# Altium PCB PD_SMARTKEY_EMN-EVAN_V2.0.PcbDoc (part 1 of 2)
Units mil, origin at the board's own origin, x right, y up, seen from the top; angles counter-clockwise.
Board outline 1720.47 x 2326.77 mil, 2 copper layers (Top Layer, Bottom Layer); 109 components, 70 nets, 316 pads, 405 vias.
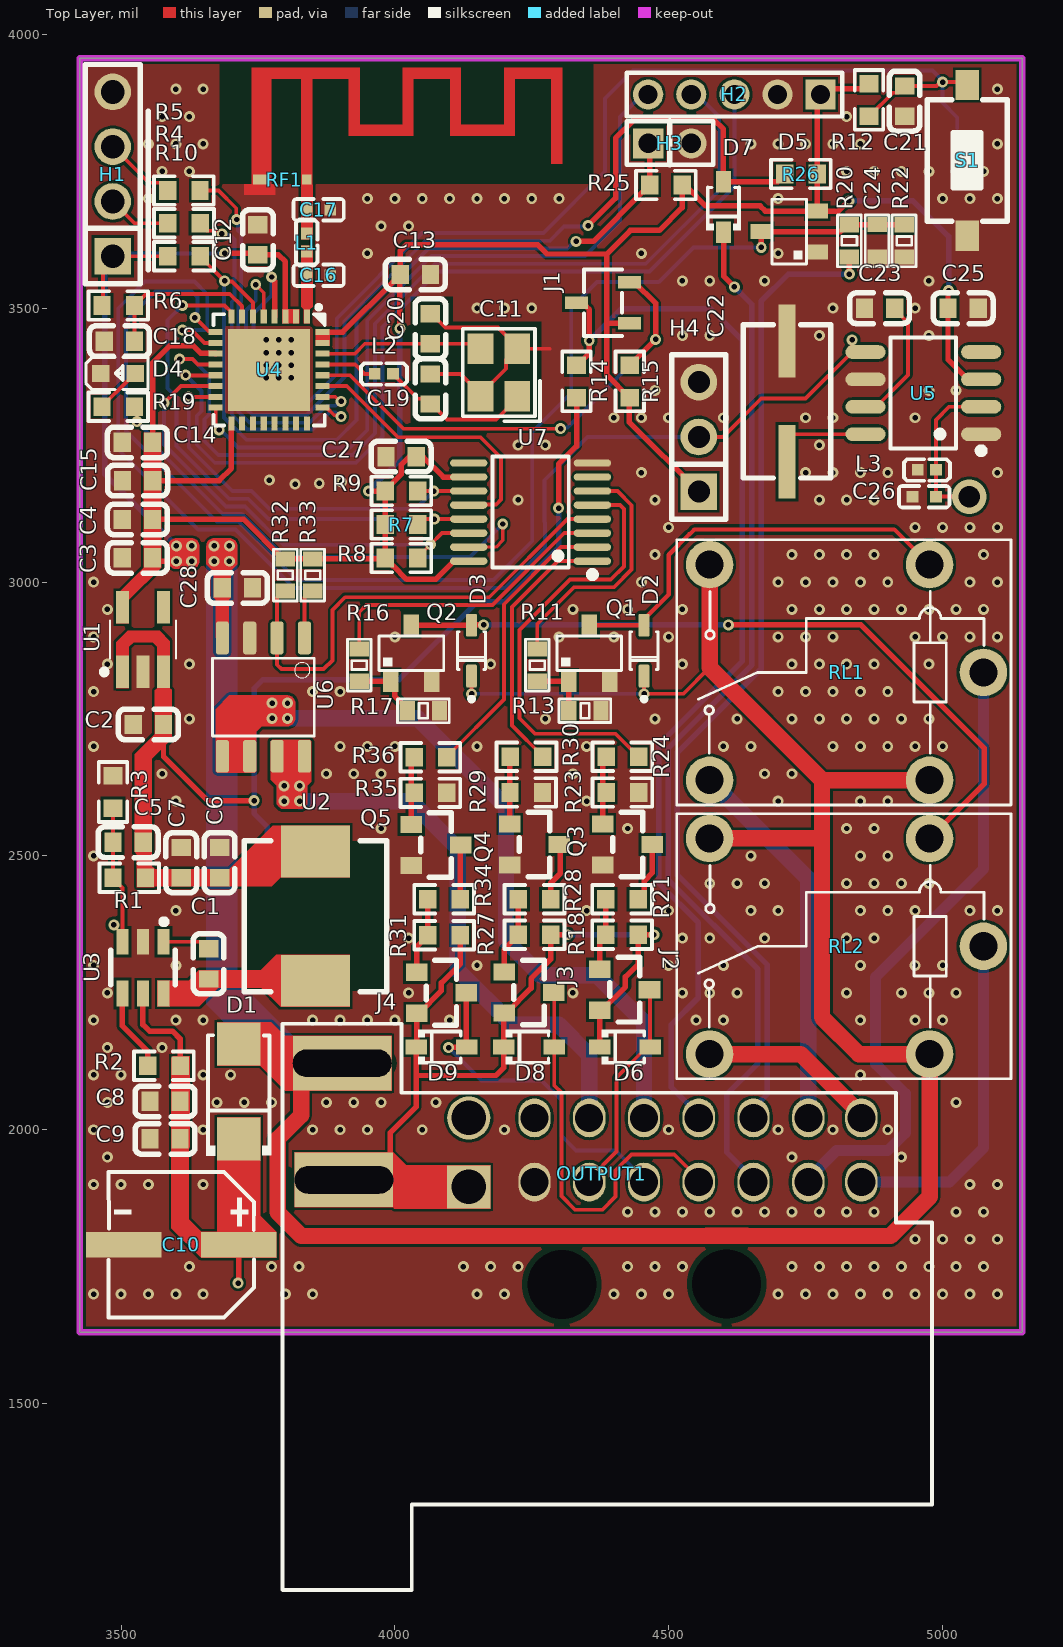
[diagram p0: Top Layer view]
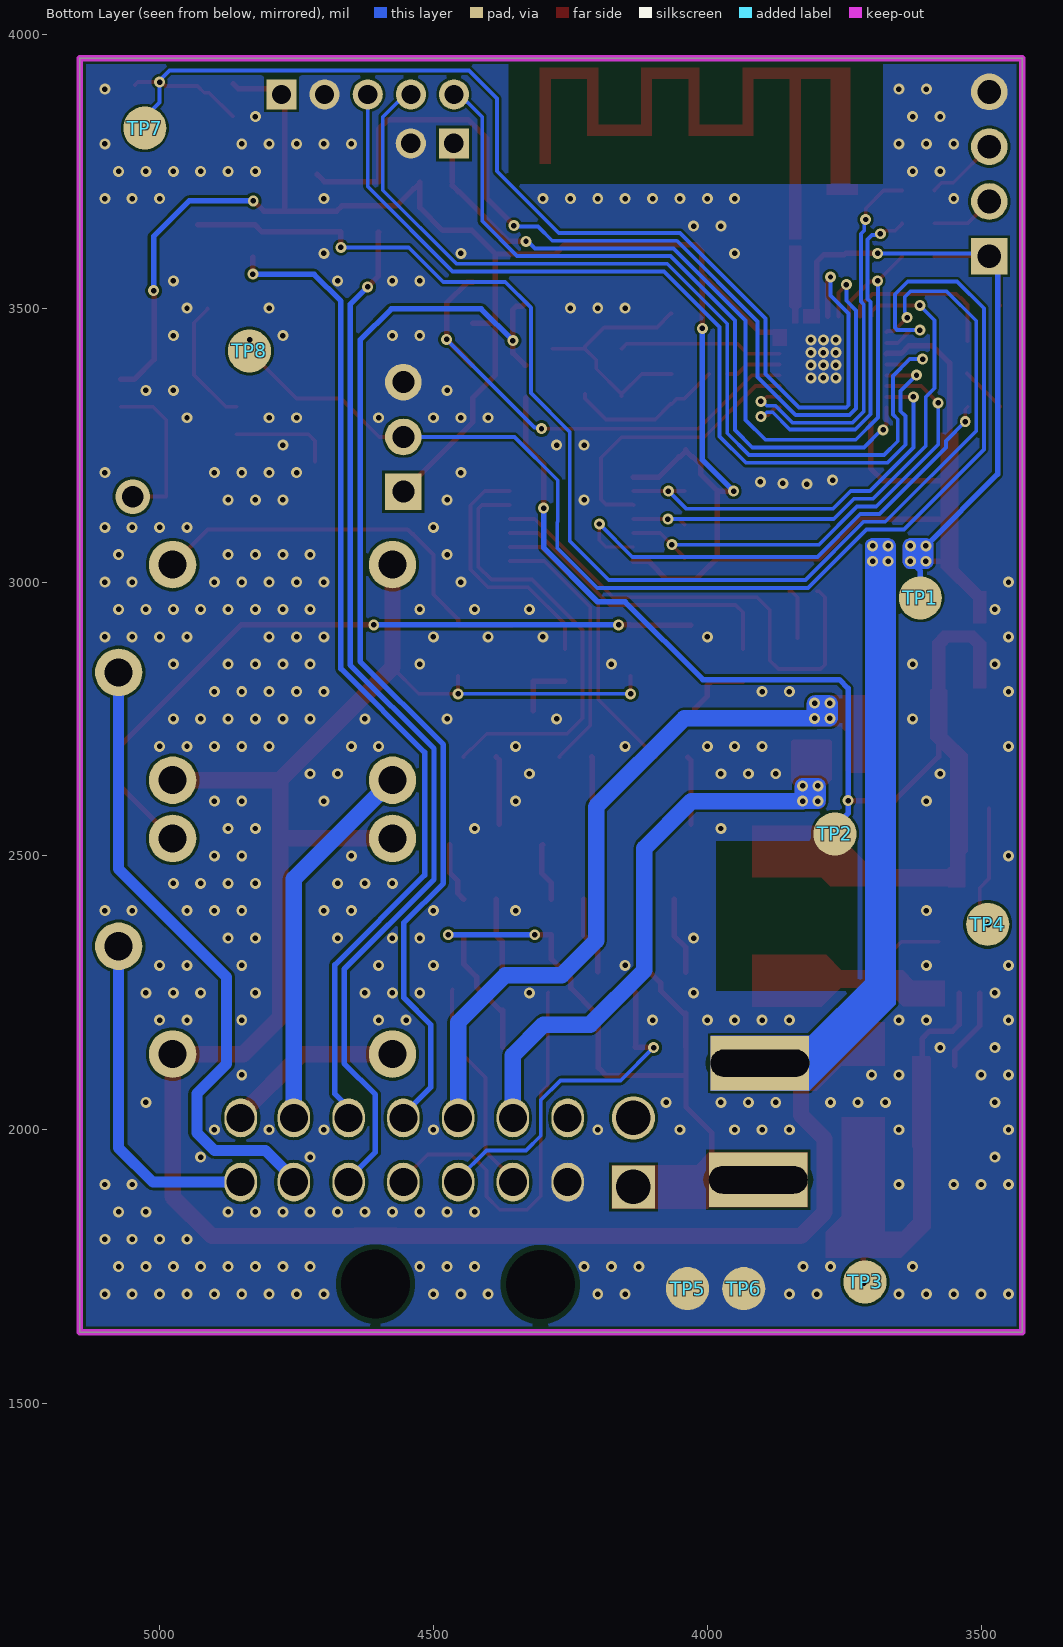
[diagram p1: Bottom Layer view, seen from below]
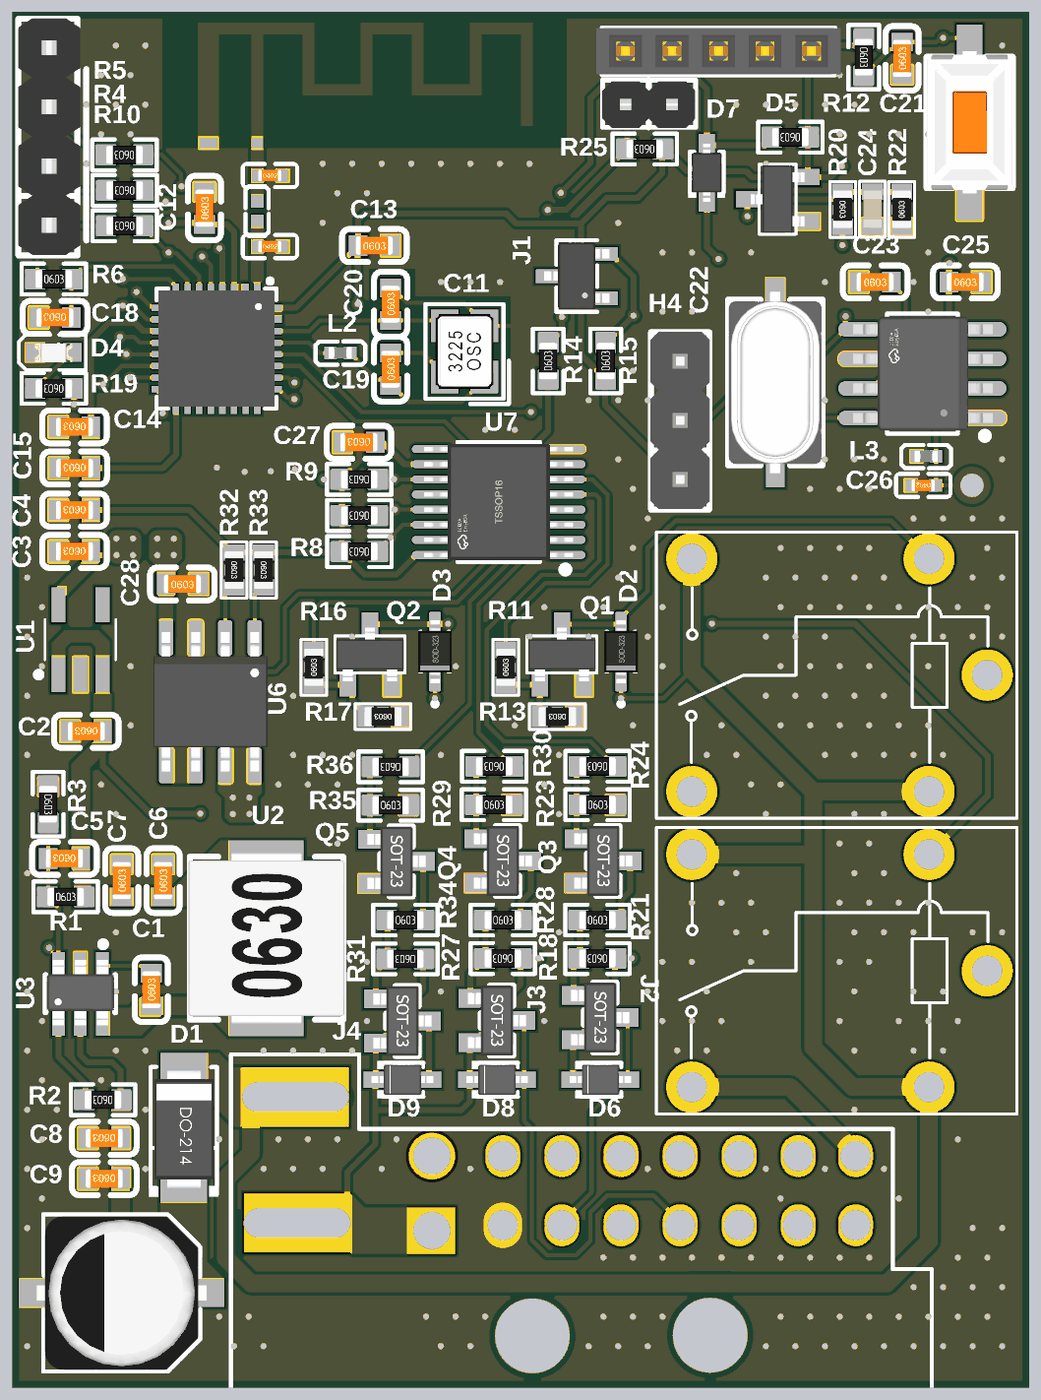
[diagram p3: 3D render of the assembled board from above, using the file's embedded part models]

## Layer stack, top to bottom
Top Solder: solder mask 0.4, Solder Resist, Dk 3.5
Top Layer: signal copper 1.4
Dielectric 1: dielectric 12.6, FR-4, Dk 4.8
Bottom Layer: signal copper 1.4
Bottom Solder: solder mask 0.4, Solder Resist, Dk 3.5

## Board outline
3425,1630 3425,3956.77 5145.47,3956.77 5145.47,1630

## Design rules (kind name [scope] priority, off if disabled: settings)
BoardOutlineClearance [All] p1: gap=7.87 ignorepadtopadclearanceinfootprint=FALSE
Clearance Clearance_1 [IsTrack vs IsTrack] p1: gap=7 ignorepadtopadclearanceinfootprint=FALSE
Clearance [All] p2: gap=5 ignorepadtopadclearanceinfootprint=FALSE except(9.84: Arc-Hole Track-Hole SMDPad-Hole THPad-Hole Via-Hole Fill-Hole Poly-Hole Region-Hole Text-Hole)
ComponentClearance [All] p1: gap=5 collisioncheckmode=3 verticalgap=5 showdistances=TRUE
DiffPairsRouting [All] p1: maxlimit=10 minlimit=5 mostfreqgap=5 toplayer_minwidth=5 toplayer_maxwidth=1000 toplayer_prefwidth=5 bottomlayer_minwidth=5 bottomlayer_maxwidth=1000 bottomlayer_prefwidth=5 maxuncoupledlength=500
Height [All] p1: minheight=0 maxheight=71497.94 prefheight=500
HoleSize [All] p1: absolutevalues=TRUE maxlimit=248.03 minlimit=11.81 maxpercent=80.000 minpercent=20.000
HoleToHoleClearance [All] p1: gap=9.84 allowstackedmicrovias=FALSE
MinimumAnnularRing [All] p1: minimumring=3
MinimumSolderMaskSliver [All] p1: minsoldermaskwidth=0
PlaneClearance [All] p1: clearance=5
PlaneConnect PlaneConnectPowerPads [InPadClass('PowerPads')] p1: planeconnectstyle=Direct reliefexpansion=20 reliefentries=4 reliefconductorwidth=10 reliefairgap=10
PlaneConnect [All] p2: pad.planeconnectstyle=Relief pad.reliefexpansion=11.81 pad.reliefentries=4 pad.reliefconductorwidth=5 pad.reliefairgap=5 via.planeconnectstyle=Direct via.reliefexpansion=11.81 via.reliefentries=4 via.reliefconductorwidth=5 via.reliefairgap=5
PolygonConnect PolygonConnectPowerPads [All vs (InPadClass('PowerPads'))] p1: connectstyle=Direct reliefconductorwidth=10 reliefentries=4 polygonreliefangle="90 Angle" airgapwidth=10
PolygonConnect [All] p2: connectstyle=Direct reliefconductorwidth=5 reliefentries=4 polygonreliefangle="90 Angle" airgapwidth=5
RoutingVias [All] p1: holewidth=10 width=20 viastyle="Through Hole" minholewidth=10 minwidth=20 maxholewidth=10 maxwidth=20
SilkToSilkClearance [All] p1: silktosilkclearance=0
SilkToSolderMaskClearance [IsPad] p1: minsilkscreentomaskgap=5 clearancetoexposedcopper=TRUE
SolderMaskExpansion [All] p1: expansion=2.95 istentingtop=FALSE
Width [All] p1: maxlimit=1000 minlimit=5 preferedwidth=5 minimp=50.000000 maximp=50.000000 favimp=50.000000
20 further rules are at their usual default settings.

## Classes and differential pairs
component class "Voltage Source": C1 C2 C3 C4 C5 C6 C7 C8 C9 C10 D1 R1 R2 R3 TP1 TP2 TP3 TP4 U1 U2 U3
component class Peripheral: C21 C22 C23 C24 C25 C26 C27 C28 D2 D3 D4 D5 D6 D7 D8 D9 H2 H3 H4 J1 J2 J3 J4 L3 Q1 Q2 Q3 Q4 Q5 R11 R12 R13 R14 R15 R16 R17 R18 R19 R20 R21 R22 R23 R24 R25 R26 R27 R28 R29 R30 R31 R32 R33 R34 R35 R36 RL1 RL2 S1 TP7 TP8 U5 U6 U7
component class "Micro Controller": C11 C12 C13 C14 C15 C16 C17 C18 C19 C20 H1 L1 L2 R4 R5 R6 R7 R8 R9 R10 RF1 TP5 TP6 U4
component class Connector: OUTPUT1
differential pair D: +D_P -D_N

## Components (designator, comment, footprint, x,y, rotation, side; value= is the part's Value field where it differs from the comment)
C1 "100nF" C0603 3660,2303 r90 top
C2 "10uF" C0603 3550,2740 r180 top
C3 "10uF" C0603 3530,3044.25 r180 top
C4 "100nF" C0603 3530,3114.25 r180 top
C5 "100pF" C0603 3512.9,2525 r180 top
C6 "100nF" C0603 3680,2487.56 r90 top
C7 "10uF" C0603 3610,2487.56 r90 top
C8 "100nF" C0603 3580.32,2051.75 r180 top
C9 "10uF" C0603 3580.32,1983.38 r180 top
C10 "VT1C101M0605" C_100uF_16V_Aluminum 3609.88,1790 r180 top
C11 "XL2EL89CPI-111YLC-40M" XL2EL89CPI-111YLC-40M 4190,3382.56 r90 top
C12 "1uF" C0603 3750,3625 r90 top
C13 "10uF" C0603 4037.44,3561.59 r0 top
C14 "10uF" C0603 3530,3255 r180 top
C15 "100nF" C0603 3530.29,3185.33 r180 top
C16 "NC" C0402 3860.83,3560 r0 top
C17 "NC" C0402 3860.83,3680 r0 top
C18 "1uF" C0603 3497.1,3440 r180 top
C19 "12pF" C0603 4065,3352.56 r90 top
C20 "12pF" C0603 4065,3462.56 r90 top
C21 "100nF" C0603 4930.75,3878.22 r90 top
C22 "6.7458M 12PF 20PPM" "6.7458M 12PF 20PPM" 4715.98,3330 r90 top
C23 "3.3uF" C0603 4885,3500 r0 top
C24 "100nF" C-0603 4880.57,3623.13 r90 top value=103
C25 "10uF" C0603 5037.56,3500 r0 top
C26 "8.2pF" C0402 4966.54,3156 r180 top
C27 "10uF" C0603 4011.44,3229 r180 top
C28 "100nF" C0603 3712.56,2989.25 r0 top
D1 "SS34" SS34 3715,2070 r90 top
D2 "1N5819" SOD-323 4455,2874.72 r90 top value=1N5007
D3 "1N5819" SOD-323 4140,2874.72 r90 top value=1N5007
D4 "RED" LED0603 3494.52,3380.86 r0 top
D5 "BAT54S" SOT23-3 4720,3640 r90 top
D6 "1N4007WS" 1N4007WS 4420,2150.75 r0 top
D7 "1N5819WS" 1N5819WS 4600,3685 r90 top
D8 "1N4007WS" 1N4007WS 4245,2150.75 r0 top
D9 "1N4007WS" 1N4007WS 4085,2150.75 r0 top
H1 "PZ2.54-S04P-A60" J_4P_XH2.54 3485,3745 r90 top
H2 "HC-PM200-4.3H-1x5PZ" JC_5P_XH2.0 4620,3890 r180 top
H3 "PZ2.0-1*2" JC_2P_XH2.0 4502,3801 r0 top
H4 "PZ254V-11-03P" PZ254V-11-03P 4555,3265 r90 top
J1 "BSS138" BSS138 4380,3510 r0 top
J2 "AO3401A" AO3401 4419.73,2255.75 r180 top
J3 "AO3401A" AO3401 4245,2250.75 r180 top
J4 "AO3401A" AO3401 4085,2250 r180 top
L1 "LQG15HS1N0B02D" L0402_1nH 3839.37,3620 r270 top
L2 "LQW15AN24NG00D" LQW15AN24NG00D 3980,3380.12 r0 top
L3 "LQW15AN24NG00D" LQW15AN24NG00D 4971.47,3205 r0 top
OUTPUT1 "JP9x2" 9x2_JP200 4393.9,1653.48 r0 top
Q1 "AO3402" SOT23-3 4355,2870 r0 top
Q2 "AO3402" SOT23-3 4030,2870 r0 top
Q3 "AO3402" AO3402 4425,2520.75 r180 top
Q4 "AO3402" AO3402 4255,2520.75 r180 top
Q5 "AO3402" AO3402 4075,2520 r180 top
R1 "51kΩ" R0603 3515,2460 r0 top
R2 "5k1Ω" R0603 3578.22,2116.75 r180 top
R3 "6.8kΩ" R0603 3485.34,2616.66 r270 top
R4 "22" R0603 3615,3655 r180 top
R5 "22" R0603 3614.66,3715 r180 top
R6 "10kΩ" R0603 3495,3505 r0 top
R7 "10kΩ" R0603 4012,3105 r180 top
R8 "10kΩ" R0603 4012,3044 r180 top
R9 "10kΩ" R0603 4011.85,3166.18 r180 top
R10 "10kΩ" R0603 3615,3595 r180 top
R11 "1K" RES-SMD-0603 4260,2848.35 r90 top
R12 "10kΩ" R0603 4865.75,3880.32 r270 top
R13 "10K" RES-SMD-0603 4347.13,2765 r180 top
R14 "10kΩ" R0603 4331.75,3366.42 r90 top
R15 "10kΩ" R0603 4429.02,3366.42 r90 top
R16 "1K" RES-SMD-0603 3935,2848.35 r90 top
R17 "10K" RES-SMD-0603 4052.13,2765 r180 top
R18 "10kΩ" R0603 4415,2355.75 r180 top
R19 "1kΩ" R0603 3495,3320 r180 top
R20 "47K" RES-SMD-0603 4830,3622.87 r270 top
R21 "5k1Ω" R0603 4415,2420.75 r0 top
R22 "10K" RES-SMD-0603 4930,3622.87 r90 top
R23 "10kΩ" R0603 4415.34,2615.75 r0 top
R24 "1kΩ" R0603 4415.34,2680.75 r180 top
R25 "10kΩ" R0603 4495,3725 r180 top
R26 "10kΩ" R0603 4741.52,3745 r180 top
R27 "10kΩ" R0603 4255,2355.75 r180 top
R28 "5k1Ω" R0603 4255,2420.75 r0 top
R29 "10kΩ" R0603 4240,2615.75 r0 top
R30 "1kΩ" R0603 4240.34,2680.75 r180 top
R31 "10kΩ" R0603 4090,2355 r180 top
R32 "10K" RES-SMD-0603 3800,3012.87 r270 top
R33 "10K" RES-SMD-0603 3850,3012.87 r270 top
R34 "5k1Ω" R0603 4090,2420.75 r0 top
R35 "10kΩ" R0603 4065,2615 r0 top
R36 "1kΩ" R0603 4065,2680 r180 top
RF1 "" 2.4GHZ-50OHMS_v1.1 3756.57,3726 r0 top
RL1 "SRA-12VDC-CL" YL318-DC12V-C 4820,2835 r0 top value="Relay SPDT, 10A, 12V"
RL2 "SRA-12VDC-CL" YL318-DC12V-C 4820,2335 r0 top value="Relay SPDT, 10A, 12V"
S1 "SW-SMD" SW-SMD 5045,3770 r270 top
TP1 "TP" TP 3611,2971 r0 top
TP2 "TP" TP 3767,2540 r0 top
TP3 "TP" TP 3712,1722 r0 top
TP4 "TP" TP 3488,2375 r0 top
TP5 "TP" TP 4036.11,1709.89 r0 top
TP6 "TP" TP 3933.37,1709.89 r0 top
TP7 "TP" TP 5027,3829 r0 top
TP8 "TP" TP 4836,3422 r0 top
U1 "AP2112K-3.3TRG1" SOT23-5 3540.16,2895 r90 top
U2 "XR0630-4R7M" SMD,7x6.6mm 3855,2390 r90 top
U3 "SM8103ADC" TSOT-23-6 3540,2305 r180 top
U4 "ESP32-C3" ESP32-C3 3770.47,3387.46 r270 top
U5 "SYN480R" SYN480R 4965,3345 r90 top
U6 "RZ7889" SO8 3760,2790 r180 top
U7 "74HC595PW,118" 74HC595PW,118 4247.82,3127.79 r90 top

## Footprints (in the part's own frame and the unit in brackets; to place one, negate y for a bottom-side part, rotate by r counter-clockwise, add the part's x,y. Pads: shape width x height; smd on the part's side, far side on the other; paste and mask are expansions set on the pad)
1N4007WS [mm] "DIODE STANDARD 1kV 1A SOD-323"
  rect 1x0.7 smd paste+0 mask+0.051: 1(-1.173,0) 2(1.173,0)
  silkscreen extent -1.08,-0.8 0.9,0.8, body extent -1.33,-0.65 1.33,0.65, height 1.21
1N5819WS [mm] "DIODE SCHOTTKY 40V SOD-323"
  rect 1x0.7 smd paste+0 mask+0.051: 1(-1.173,0) 2(1.173,0)
  silkscreen extent -1.08,-0.8 0.9,0.8, body extent -1.25,-0.65 1.25,0.65, height 1
2.4GHZ-50OHMS_v1.1 [mm]
  rect 0.45x0.45 smd: 1(2.103,0.229)
  rect 0.8x0.45 smd: 2(0,0.229)
  Top Layer region: 13.947,0.963 13.447,0.963 13.447,4.903 11.747,4.903 11.747,2.263 8.747,2.263 8.747,4.903 7.047,4.903 7.047,2.263 4.047,2.263 4.047,4.903 2.347,4.903 2.347,0.003 1.847,0.003 1.847,4.903 0.447,4.903 0.447,0.003 -0.453,0.003 -0.453,5.403 4.547,5.403 4.547,2.763 6.547,2.763 6.547,5.403 9.247,5.403 9.247,2.763 11.247,2.763 11.247,5.403 13.947,5.403
"6.7458M 12PF 20PPM" [mm] "CRYSTAL 6.7458MHz 12pF SMD"
  rect 3.4x0.8 smd paste+0 mask+0.05: 1(-2.8,0) 2(2.8,0)
  silkscreen extent -3.56,-2.03 3.56,2.03, body extent -3.9,-2 3.9,2, height 2.35
9x2_JP200 [mm]
  rect 2x2 hole 1.6 paste-2539.97: 1(-6.579,6.147)
  oval 1.5x1.8 hole 1.3: 2(-3.531,6.375) 3(-0.991,6.375) 4(1.549,6.375) 5(4.089,6.375) 6(6.629,6.375) 7(9.169,6.375) 8(11.633,6.375) 9(11.633,9.347) 10(9.169,9.347) 11(6.629,9.347) 14(-0.991,9.347) 15(-3.531,9.347)
  oval 1.5x1.8 hole 1.3 mask+0.127: 12(4.089,9.347) 13(1.549,9.347)
  round 2 hole 1.6 mask+0.127: 16(-6.579,9.347)
  rect 4.572x2.54 hole 1.27 slot 4.572 at 0 deg: 17(-12.446,11.887) 18(-12.37,6.477)
  round 1.524 hole 3.2: ""(-2.261,1.626) ""(5.385,1.651)
  silkscreen extent -15.21,-12.55 14.91,13.72, body extent -15.21,-12.55 14.91,13.72, height 17
74HC595PW,118 [mm] "8-bit serial-in, serial or parallel-out shift register with output latches; 3-state"
  oval 0.343x1.731 smd paste+0 mask+0.051: 1(-2.275,-2.866) 2(-1.625,-2.866) 3(-0.975,-2.866) 4(-0.325,-2.866) 5(0.325,-2.866) 6(0.975,-2.866) 7(1.625,-2.866) 8(2.275,-2.866) 9(2.275,2.866) 10(1.625,2.866) 11(0.975,2.866) 12(0.325,2.866) 13(-0.325,2.866) 14(-0.975,2.866) 15(-1.625,2.866) 16(-2.275,2.866)
  silkscreen extent -3.05,-3.02 2.58,1.77, body extent -2.5,-3.2 2.5,3.2, height 1.03
AO3401 [mm]
  rect 1x0.8 smd paste+0 mask+0.051: 1(1.15,-0.95) 2(1.15,0.95) 3(-1.15,0)
  silkscreen extent -0.7,-1.5 0.7,1.5, body extent -1.25,-1.5 1.25,1.5, height 1.1
AO3402 [mm] "MOSFET N-CH 30V SOT-23"
  rect 1x0.8 smd paste+0 mask+0.051: 1(1.15,-0.95) 2(1.15,0.95) 3(-1.15,0)
  silkscreen extent -0.7,-1.5 0.7,1.5, body extent -1.25,-1.5 1.25,1.5, height 1.1
BSS138 [mm] "MOSFET N-CH 50V 0.22A SOT-23"
  rect 1.07x0.6 smd paste+0 mask+0.051: 1(1.235,-0.95) 2(1.235,0.95) 3(-1.235,0)
  silkscreen extent -0.88,-1.54 0.88,1.54, body extent -1.4,-1.45 1.4,1.45, height 1.1
C0402 [mm]
  rect 0.54x0.54 smd paste-100 mask+0.051: 1(-0.545,0) 2(0.545,0)
  silkscreen extent -1.17,-0.5 1.17,0.5, body extent -0.5,-0.25 0.5,0.25, height 0.36
C0603 [mm]
  rect 0.8x0.9 smd: 1(-0.7,0) 2(0.7,0)
  silkscreen extent -1.39,-0.71 1.39,0.71, body extent -0.8,-0.4 0.8,0.4, height 0.4
C-0603 [mm]
  rect 0.7x0.9 smd: 1(-0.75,0) 2(0.75,0)
  silkscreen extent -1.2,-0.55 1.2,0.55, body extent -0.8,-0.4 0.8,0.4, height 0.8
C_100uF_16V_Aluminum [mm] "100uF 16V ±20% 63mA@120Hz SMD,D6.3xL5.4mm Aluminum Electrolytic Capacitors RoHS"
  rect 3.5x1.2 smd paste+0 mask+0.051: 1(-2.67,0) 2(2.67,0)
  silkscreen extent -3.38,-3.38 3.38,3.38, body extent -3.65,-3.3 3.65,3.3, height 5.8
ESP32-C3 [mm] "Others 160MHz QFN-32-EP(5x5) RF Transceiver Modules and Modems RoHS"
  rect 0.65x0.28 smd paste-100 mask+0.051: 1(-2.478,1.75) 2(-2.478,1.25) 3(-2.478,0.75) 4(-2.478,0.25) 5(-2.478,-0.25) 6(-2.478,-0.75) 7(-2.478,-1.25) 8(-2.478,-1.75) 17(2.478,-1.75) 18(2.478,-1.25) 19(2.478,-0.75) 20(2.478,-0.25) 21(2.478,0.25) 22(2.478,0.75) 23(2.478,1.25) 24(2.478,1.75)
  rect 0.28x0.65 smd paste-100 mask+0.051: 9(-1.75,-2.478) 10(-1.25,-2.478) 11(-0.75,-2.478) 12(-0.25,-2.478) 13(0.25,-2.478) 14(0.75,-2.478) 15(1.25,-2.478) 16(1.75,-2.478) 25(1.75,2.478) 26(1.25,2.478) 27(0.75,2.478) 28(0.25,2.478) 29(-0.25,2.478) 30(-0.75,2.478) 31(-1.25,2.478) 32(-1.75,2.478)
  rect 3.8x3.8 smd paste-100 mask+0.051: 33(0,0)
  silkscreen extent -3,-2.58 2.58,2.58, body extent -2.5,-2.5 2.5,2.5, height 0.9
J_4P_XH2.54 [mm] "1kV 1 2.54mm Pin Header 3A 2.5mm Through Hole 6mm -40?~+105? 3mm Gold 4P Black 1x4P Through Hole,P=2.54mm Headers, Male Pins RoHS"
  rect 1.7x1.7 hole 1.1 paste-2539.97 mask+0.051: 1(-3.81,0)
  round 1.7 hole 1.1 paste-2539.97 mask+0.051: 2(-1.27,0) 3(1.27,0) 4(3.81,0)
  silkscreen extent -5.08,-1.27 5.08,1.27, body extent -5.05,-1.38 5.12,1.28, height 8.54
JC_2P_XH2.0 [mm] "CONN HEADER 2POS 2mm SINGLE ROW TH"
  rect 1.4x1.4 hole 0.9 paste-2539.97 mask+0.051: 1(-1,0)
  round 1.4 hole 0.9 paste-2539.97 mask+0.051: 2(1,0)
  silkscreen extent -1.99,-1 2.02,1.03, body extent -2,-1.03 2.01,0.97, height 5.9
JC_5P_XH2.0 [mm] "CONN SOCKET 5POS 2mm SINGLE ROW TH"
  rect 1.4x1.4 hole 0.889 paste-2539.97 mask+0.051: 1(-4,-0.013)
  round 1.4 hole 0.889 paste-2539.97 mask+0.051: 2(-2,-0.013) 3(0,-0.013) 4(2,-0.013) 5(4,-0.013)
  silkscreen extent -5,-1.01 5,1.01, body extent -5.25,-1.01 5.26,0.99, height 6.35
L0402_1nH [mm]
  rect 0.54x0.54 smd paste+0 mask+0.051: 1(-0.42,0) 2(0.42,0)
  silkscreen extent -1.07,-0.51 1.07,0.49
LED0603 [mm]
  rect 0.8x0.8 smd paste+0 mask+0.051: 1(-0.799,-0.004) 2(0.799,0.004)
  silkscreen extent -1.49,-0.75 1.39,0.76, body extent -0.8,-0.42 0.8,0.38, height 0.7
LQW15AN24NG00D [mm] "FIXED IND 24nH 280mA 520mO 0402"
  rect 0.54x0.54 smd paste+0 mask+0.051: 1(-0.42,0) 2(0.42,0)
  silkscreen extent -1.07,-0.51 1.07,0.49, body extent -0.5,-0.25 0.5,0.25, height 0.5
PZ254V-11-03P [mm] "CONN HEADER 3POS 2.54mm SINGLE ROW TH"
  rect 1.7x1.7 hole 1.02 paste-2539.97 mask+0.051: 1(-2.54,0)
  round 1.7 hole 1.02 paste-2539.97 mask+0.051: 2(0,0) 3(2.54,0)
  silkscreen extent -3.81,-1.25 3.81,1.25, body extent -3.78,-1.27 3.85,1.27, height 8
R0603 [mil]
  rect 31.75x34.02 smd paste-3937.01 mask+2: 1(-29.66,0) 2(29.66,0)
  silkscreen extent -55,-26 55,26, body extent -31,-16 31,16, height 18
RES-SMD-0603 [mm]
  rect 0.7x0.9 smd: 1(-0.75,0) 2(0.75,0)
  silkscreen extent -1.2,-0.55 1.2,0.55, body extent -0.8,-0.4 0.8,0.4, height 0.43
SMD,7x6.6mm [mm] "FIXED IND 4.7uH 6A 33mO SMD,0630"
  rect 2.4x3.2 smd paste+0 mask+0.051: 1(-3,0) 2(3,0)
  silkscreen extent -3.5,-3.3 3.5,3.3, body extent -3.65,-3.35 3.65,3.35, height 3.01
SO8 [mil]
  rrect40% 24x60 smd: 1(-75,-108) 2(-25,-108) 3(25,-108) 4(75,-108) 5(75,108) 6(25,108) 7(-25,108) 8(-75,108)
  silkscreen extent -93,-71 93,71, body extent -96,-118 96,118, height 69
SOD-323 [mm]
  rrect25% 1.06x0.5 smd: 1(1.18,0) 2(-1.18,0)
  silkscreen extent -2.35,-0.65 0.87,0.65, body extent -1.35,-0.72 1.35,0.72, height 1.17
SOT23-3 [mm]
  rect 0.7x1 smd: 1(-0.95,-1.3) 2(0.95,-1.3) 3(0,1.3)
  silkscreen extent -1.5,-0.8 1.5,0.8, body extent -1.45,-1.15 1.45,1.15, height 1.1
SOT23-5 [mm]
  rect 1.5x0.6 smd: 1(-1.5,0.95) 2(-1.5,0) 3(-1.5,-0.95) 4(1.5,-0.95) 5(1.5,0.95)
  silkscreen extent -1.62,-1.52 0.87,1.92, body extent -1.75,-1.52 1.75,1.53, height 1.45
SS34 [mm]
  rect 2x2 smd paste+0 mask+0.051: 1(-2.2,0) 2(2.2,0)
  silkscreen extent -2.98,-1.5 2.6,1.5, body extent -2.65,-1.29 2.49,1.27, height 2.63
SW-SMD [mm]
  rect 1.4x1.1 smd: 1(-3.5,0) 2(3.5,0)
  silkscreen extent -2.82,-1.85 2.82,1.85, body extent -3.05,-1.85 3.05,1.85, height 2.5
SYN480R [mm] "433/315 MHz wireless receiver chips"
  oval 0.63x1.865 smd paste+0 mask+0.051: 1(-1.905,-2.682) 2(-0.635,-2.682) 3(0.635,-2.682) 4(1.905,-2.682) 5(1.905,2.682) 6(0.635,2.682) 7(-0.635,2.682) 8(-1.905,2.682)
  silkscreen extent -2.82,-2.83 2.58,1.52, body extent -2.45,-3.03 2.45,2.97, height 1.49
TP [mm]
  round 2 smd far side paste+0 mask+0.051: 1(0,0)
TSOT-23-6 [mm] "High Efficiency, 3.0A, 18V Input Synchronous Step Down Regulator"
  rect 0.55x1.2 smd paste+0 mask+0.051: 1(-0.95,-0.974) 2(0,-0.974) 3(0.95,-0.974) 4(0.95,1.426) 5(0,1.426) 6(-0.95,1.426)
  silkscreen extent -1.5,-2.03 1.5,1.03, body extent -1.45,-1.22 1.45,1.58, height 1
XL2EL89CPI-111YLC-40M [mm] "CRYSTAL 40MHz 15pF SMD"
  rect 1.4x1.2 smd paste+0 mask+0.051: 1(-1.1,-0.85) 2(1.1,-0.85) 3(1.1,0.85) 4(-1.1,0.85)
  silkscreen extent -2.26,-1.91 2.03,1.68, body extent -1.6,-1.25 1.6,1.25, height 0.68
YL318-DC12V-C [mm]
  round 2.2 hole 1.3: 1(6.47,0) 2(-6.23,-5) 3(-6.23,5) 4(3.97,5) 5(3.97,-5)
  silkscreen extent -7.75,-6.15 7.75,6.15, body extent -7.75,-6.15 7.75,6.15, height 13.5

## Part data
C1 C6 C8 C21 C28: library part C0603_100nF_±1%, LCSC Part #=C513681, Manufacturer=YAGEO, Mfr. Part #=CC0402FRNPO9BN100, Package=0603, Tolerance=±1%, Voltage Rating=50V, Capacitance=100nF, Link=https://www.lcsc.com/product-detail/C513681.html?s_z=n_capital%2520yageo%252010pF%25200402
C2 C3 C13 C14: library part C0603_10uF_±1%, "50V 10pF NP0 ±1% 0402 Multilayer Ceramic Capacitors MLCC - SMD/SMT ROHS", LCSC Part #=C513681, Manufacturer=YAGEO, Mfr. Part #=CC0402FRNPO9BN100, Package=0603, Tolerance=±1%, Voltage Rating=50V, Capacitance=10uF, Link=https://www.lcsc.com/product-detail/C513681.html?s_z=n_capital%2520yageo%252010pF%25200402
C4 C15: library part C0603_100nF_±1%, "50V 10pF NP0 ±1% 0402 Multilayer Ceramic Capacitors MLCC - SMD/SMT ROHS", LCSC Part #=C513681, Manufacturer=YAGEO, Mfr. Part #=CC0402FRNPO9BN100, Package=0603, Tolerance=±1%, Voltage Rating=50V, Capacitance=100nF, Link=https://www.lcsc.com/product-detail/C513681.html?s_z=n_capital%2520yageo%252010pF%25200402
C5: library part C0603_100pF_±1%, LCSC Part #=C513681, Manufacturer=YAGEO, Mfr. Part #=CC0402FRNPO9BN100, Package=0603, Tolerance=±1%, Voltage Rating=50V, Capacitance=100pF, Link=https://www.lcsc.com/product-detail/C513681.html?s_z=n_capital%2520yageo%252010pF%25200402
C7 C9 C25 C27: library part C0603_10uF_±1%, LCSC Part #=C513681, Manufacturer=YAGEO, Mfr. Part #=CC0402FRNPO9BN100, Package=0603, Tolerance=±1%, Voltage Rating=50V, Capacitance=10uF, Link=https://www.lcsc.com/product-detail/C513681.html?s_z=n_capital%2520yageo%252010pF%25200402
C10: library part C_100uF_16V_aluminum, "100uF 16V ±20% 63mA@120Hz SMD,D6.3xL5.4mm Aluminum Electrolytic Capacitors RoHS", LCSC Part #=C90273, Manufacturer=ROQANG, Package=SMD,D6.3xL5.4mm, Key Attributes="CAP ALUM 100uF ±20% 16V SMD", Link=https://www.lcsc.com/product-detail/C90273.html?s_z=n_capital%2520100uf%2520aluminum, Mfr. Part #=VT1C101M0605
C11: "Crystal Oscillator 15pF SMD3225-4P Crystals RoHS", LCSC Part #=C5444549, Manufacturer="YXC Crystal Oscillators", Package=SMD3225-4P, Key Attributes="Crystal Oscillator 15pF SMD3225-4P Crystals RoHS", Link=https://www.lcsc.com/product-detail/C5444549.html?s_z=n_oscillator, Mfr. Part #=XL2EL89CPI-111YLC-40M
C12 C18: library part C0603_1uF_±1%, "50V 10pF NP0 ±1% 0402 Multilayer Ceramic Capacitors MLCC - SMD/SMT ROHS", LCSC Part #=C513681, Manufacturer=YAGEO, Mfr. Part #=CC0402FRNPO9BN100, Package=0603, Tolerance=±1%, Voltage Rating=50V, Capacitance=1uF, Link=https://www.lcsc.com/product-detail/C513681.html?s_z=n_capital%2520yageo%252010pF%25200402
C16 C17: library part C0402_NC_±1%, Capacitance=1uF, LCSC Part #=C513681, Manufacturer=YAGEO, Mfr. Part #=CC0402FRNPO9BN100, Package=0402, Tolerance=±1%, Voltage Rating=50V, Link=https://www.lcsc.com/product-detail/C513681.html?s_z=n_capital%2520yageo%252010pF%25200402
C19 C20: library part C0603_12pF_±1%, "50V 10pF NP0 ±1% 0402 Multilayer Ceramic Capacitors MLCC - SMD/SMT ROHS", LCSC Part #=C513681, Manufacturer=YAGEO, Mfr. Part #=CC0402FRNPO9BN100, Package=0603, Tolerance=±1%, Voltage Rating=50V, Capacitance=12pF, Link=https://www.lcsc.com/product-detail/C513681.html?s_z=n_capital%2520yageo%252010pF%25200402
C22: "CRYSTAL 6.7458MHz 12pF SMD", LCSC Part #=C4944008, Load Capacitance=20pF, Manufacturer=SOSET, Package=HC-49S-SMD-2P-Mini, Link=https://www.lcsc.com/product-detail/C4944008.html?utm_source=chatgpt.com, Mfr. Part #="6.7458M 12PF 20PPM"
C23: library part C0603_3.3uF_±10%, LCSC Part #=C710616, Manufacturer=muRata, Mfr. Part #=GCJ188C70J335KE02D, Package=0603, Temperature Coefficient=X7S, Tolerance=±10%, Voltage Rating=50V, Capacitance=3.3uF, Link=https://www.lcsc.com/product-detail/C710616.html?s_z=n_Capita%25200603%25203.3uF%2520yageo
C24: library part CM, "Cap SMD"
C26: library part C0402_10pF_±1%, "50V 10pF NP0 ±1% 0402 Multilayer Ceramic Capacitors MLCC - SMD/SMT ROHS", Capacitance=10pF, LCSC Part #=C513681, Manufacturer=YAGEO, Mfr. Part #=CC0402FRNPO9BN100, Package=0402, Tolerance=±1%, Voltage Rating=50V, Link=https://www.lcsc.com/product-detail/C513681.html?s_z=n_capital%2520yageo%252010pF%25200402
D1: "40V Independent 3A 550mV@3A SMA(DO-214AC) Schottky Diodes ROHS", Current - Rectified=3A, LCSC Part #=C8678, Manufacturer="MDD(Microdiode Semiconductor)", Package=SMA(DO-214AC), Voltage - DC Reverse(Vr)=40V, Link=https://www.lcsc.com/product-detail/C8678.html?s_z=n_SS34, Mfr. Part #=SS34
D2 D3: library part "Diode SMD", "Default Diode", Code - JEDEC=DO-214-AB, Published=8-Jun-2000, Publisher="Altium Limited", Revision="July-2002: Re-released for DXP Platform."
D4: library part D0603_RED, "25mcd~40mcd Water Clear -40℃~+85℃ 624nm Red 120° 60mW 0402 LED Indication - Discrete ROHS", LCSC Part #=C965793, Manufacturer=XINGLIGHT, Mfr. Part #=XL-1005UGC, Package=0603, Power(Watts)=60mW, Voltage - Forward(Vf)=3V, Illumination Color=RED, Link=https://www.lcsc.com/product-detail/C136765.html?s_z=n_LED%25200402%2520RED
D5: library part "Schottky Dual Diode SMD", "Diode 30V 0.2A Surface Mount SOT-23", Datasheet=https://diotec.com/request/datasheet/bat54.pdf, ki_description="Dual Schottky Diode in Series", ki_keywords="Dual Schottky Diode Series"
D6 D8 D9: "DIODE STANDARD 1kV 1A SOD-323", LCSC Part #=C193404, Manufacturer="MDD(Microdiode Semiconductor)", Package=SOD-323, Link=https://www.lcsc.com/product-detail/C193404.html?utm_source=chatgpt.com, Mfr. Part #=1N4007WS
D7: "DIODE SCHOTTKY 40V SOD-323", LCSC Part #=SOD-323, Manufacturer="Guangdong Hottech", Link=https://www.lcsc.com/product-detail/C191023.html?s_z=n_q_t_1n5819&spm=wm.fly.bg.0.xh___wm.ssy.tc.0.tz&lcsc_vid=FFlaVlZURFlbX1EAE1lbUlZfQwdeBlBRQ1VZBFdQQwUxVlNeQ1RdUFFfRVVZVDsOAxUeFF5JWBYZEEoKFBINSQcJGk4eFQsCAgIaSgADAwAHC0slRFJfVVJQRE8GEwkK, Mfr. Part #=1N5819WS, Package=SOD-323
H1: library part J_4P_XH2.54, "1kV 1 2.54mm Pin Header 3A 2.5mm Through Hole 6mm -40℃~+105℃ 3mm Gold 4P Black 1x4P Through Hole,P=2.54mm Headers, Male Pins RoHS", LCSC Part #=C42431795, Manufacturer=JXTCONN, Link=https://www.lcsc.com/product-detail/C42431795.html?s_z=n_q_t_header%25204%2520p&spm=wm.fly.bg.0.xh___wm.ssy.tc.0.tz&lcsc_vid=FlRcBlcDRFNZAlJQT1RZBVJSEVFcX11eRVQPBFEHFgAxVlNeQVVcV1RRRlFeUzsOAxUeFF5JWBYZEEoKFBINSQcJGk4dAgUUFAk%3D, MPN=PZ2.54-S04P-A60, Packaging="Through Hole,P=2.54mm"
H2: library part JC_5P_XH2.0X_, "CONN SOCKET 5POS 2mm SINGLE ROW TH", LCSC Part #=C22436139, Manufacturer="Hong Cheng", Link=https://www.lcsc.com/product-detail/C22436139.html?utm_source=chatgpt.com, MPN=HC-PM200-4.3H-1x5PZ, Packaging="Through Hole,P=2mm"
H3: library part JC_2P_XH2.54, "CONN HEADER 2POS 2mm SINGLE ROW TH", LCSC Part #=C5224022, Manufacturer=ZHOURI, Link=https://www.lcsc.com/product-detail/C5224022.html?utm_source=chatgpt.com, MPN=PZ2.0-1*2, Packaging="Through Hole,P=2mm"
H4: "CONN HEADER 3POS 2.54mm SINGLE ROW TH", LCSC Part #=C2937625, Manufacturer=XFCN, Link=https://www.lcsc.com/product-detail/C2937625.html?s_z=n_q_t_header%25203%2520Position&spm=wm.fly.bg.3.xh___wm.ssy.tc.0.tz&lcsc_vid=FlRcBlcDRFNZAlJQT1RZBVJSEVFcX11eRVQPBFEHFgAxVlNeQVVaV1BSRFVfXjsOAxUeFF5JWBYZEEoKFBINSQcJGk4dAgUUFAk%3D, MPN=PZ254V-11-03P, Packaging="Through Hole,P=2.54mm"
J1: "MOSFET N-CH 50V 0.22A SOT-23", LCSC Part #=C52895, Manufacturer=onsemi, Package=SOT-23, Link=https://www.lcsc.com/product-detail/C52895.html?s_z=n_q_x_bss138&spm=wm.ssy.em.0.tz&lcsc_vid=FFlaVlZURFlbX1EAE1lbUlZfQwdeBlBRQ1VZBFdQQwUxVlNeQlVeVVZeQlBWUTsOAxUeFF5JWBYZEEoKFBINSQcJGk4eFQsCAgIaSgADAwAHC0slTlBeX1dIHxUDCw%3D%3D, Mfr. Part #=BSS138
J2 J3 J4: library part AO3401, "30V 4A 900mV@250uA 1 P-Channel SOT-23 MOSFETs ROHS", Current - Continuous Drain(Id)=4A, Drain to Source Voltage=30V, LCSC Part #=C15127, Manufacturer=AOS, Package=SOT-23, Link=https://www.lcsc.com/product-detail/C15127.html?s_z=n_AO3401, Mfr. Part #=AO3401A
L1: library part L0402_1nH, "FIXED IND 1nH 1A 70mΩ 0402", LCSC Part #=C162538, Manufacturer=muRata, Link=https://www.lcsc.com/product-detail/C162538.html?s_z=n_q_0402%2520inductor%25201nH&spm=wm.fly.bg.1.xh&lcsc_vid=FFlaVlZURFlbX1EAE1lbUlZfQwdeBlBRQ1VZBFdQQwUxVlNeQ1FfVlBVRFlZVjsOAxUeFF5JWBYZEEoKFBINSQcJGk4NBhADEA4cHktXRllfSQwSGg0%3D, MPN=LQG15HS1N0B02D, Packaging=0402
L2 L3: "FIXED IND 24nH 280mA 520mΩ 0402", LCSC Part #=C167472, Manufacturer=muRata, Package=0402, Link=https://www.lcsc.com/product-detail/C167472.html?s_z=n_q_inductor%252024nH%25200402&spm=wm.fly.bg.0.xh&lcsc_vid=FlRcBlcDRFNZAlJQT1RZBVJSEVFcX11eRVQPBFEHFgAxVlNeQVRfUFJVQVNZUzsOAxUeFF5JWBYZEEoKFBINSQcJGk4eFQsCAgIaSgADAwAHC0slRlhdU1RSWQkaCgg%3D, Mfr. Part #=LQW15AN24NG00D
OUTPUT1: library part JP9x2_1, "WR-PHD 2.54 mm Dual Socket Header", Manufacturer="W¨¹rth Elektronik eiSos GmbH", partNo=61301821821, ComponentLink1 Description=Manufacturer, ComponentLink1URL=http://www.we-online.com, ComponentLink2 Description=Datasheet, ComponentLink2URL=http://katalog.we-online.de/em/datasheet/6130xx21821.pdf, Created by="Karrer Zheng", Created Date="29 March 2013", NoPins=18
Q1 Q2: library part SI2302DS, "N-Channel 20V 2.5A _Tc_ 830mW _Tc_ Surface Mount TO-236AB _SOT23_", Package=None, Availability=Unavailable, MF="NXP Semiconductors", MP=SI2302DS, Price=None, SnapEDA_Link=https://www.snapeda.com/parts/SI2302DS/NXP%20Semiconductors/view-part/4701514/?ref=snap
Q3 Q4 Q5: "MOSFET N-CH 30V SOT-23", LCSC Part #=C14385, Manufacturer=AOS, Link=https://www.lcsc.com/product-detail/C14385.html?s_z=n_q_ao3402&spm=wm.fly.bg.0.xh&lcsc_vid=FFlaVlZURFlbX1EAE1lbUlZfQwdeBlBRQ1VZBFdQQwUxVlNeRVZXVF1QQ1BYXzsOAxUeFF5JWBYZEEoKFBINSQcJGk4NBhADEA4cHktXR1FWSQwSGg0%3D, MPN=AO3402, Packaging=SOT-23
R1: library part R0603_51kΩ_±1%, "100mW Thick Film Resistor 75V ±100ppm/℃ ±1% 51kΩ 0603 Chip Resistor - Surface Mount ROHS", LCSC Part #=C2907044, Manufacturer=FOJAN, Mfr. Part #=FRC0603F5101TS, Package=0603, Tolerance=±1%, Key Attributes="RES 5.1kΩ ±1% 100mW 0603", Link=https://www.lcsc.com/product-detail/C2907044.html?s_z=n_5k1%25200603, Resistance=51kΩ
R2 R21 R28 R34: library part R0603_5k1Ω_±1%, "100mW Thick Film Resistor 75V ±100ppm/℃ ±1% 5.1kΩ 0603 Chip Resistor - Surface Mount ROHS", LCSC Part #=C2907044, Manufacturer=FOJAN, Mfr. Part #=FRC0603F5101TS, Package=0603, Tolerance=±1%, Key Attributes="RES 5.1kΩ ±1% 100mW 0603", Link=https://www.lcsc.com/product-detail/C2907044.html?s_z=n_5k1%25200603, Resistance=5k1Ω
R3: library part R0603_6.8kΩ_±1%_1, "6.8k", LCSC Part #=C138066, Manufacturer=YAGEO, Mfr. Part #=RC0402FR-0710RL, Package=0603, Tolerance=±1%, Link=https://www.lcsc.com/product-detail/C138066.html?s_z=n_resistor%25200402%252010R, Resistance=6.8kΩ
R4 R5: library part R0603_0Ω_±5%, "100mW Thick Film Resistor 75V ±5% 0Ω 0603 Chip Resistor - Surface Mount ROHS", LCSC Part #=C95177, Manufacturer=YAGEO, Mfr. Part #=RC0603JR-070RL, Package=0603, Resistance=0Ω, Tolerance=±5%, Key Attributes="RES 0Ω ±5% 100mW 0603", Link=https://www.lcsc.com/product-detail/C138066.html?s_z=n_resistor%25200402%252010R
R6 R7 R8 R9 R10 R12 R14 R15 R18 R23 R25 R26 R27 R29 R31 R35: library part R0603_10kΩ_±1%, "62.5mW Thick Film Resistor 50V ±1% ±200ppm/℃ 10Ω 0402 Chip Resistor - Surface Mount ROHS", LCSC Part #=C138066, Manufacturer=YAGEO, Mfr. Part #=RC0402FR-0710RL, Package=0603, Tolerance=±1%, Link=https://www.lcsc.com/product-detail/C138066.html?s_z=n_resistor%25200402%252010R, Resistance=10kΩ
R11 R13 R16 R17 R20 R22 R32 R33: library part Res-SMD, "Resistor", Manufacturer="Generic Components", Class=Passive, Published=08/06/2000, Publisher="Altium Hobart Technology Centre"
R19 R24 R30 R36: library part R0603_1kΩ_±1%, "62.5mW Thick Film Resistor 50V ±1% ±200ppm/℃ 10Ω 0402 Chip Resistor - Surface Mount ROHS", LCSC Part #=C138066, Manufacturer=YAGEO, Mfr. Part #=RC0402FR-0710RL, Package=0603, Tolerance=±1%, Link=https://www.lcsc.com/product-detail/C138066.html?s_z=n_resistor%25200402%252010R, Resistance=1kΩ
RF1: library part Antenna
RL1 RL2: library part "Relay 1", "Relay SPDT,10A - 12VDC 5 Pin"
S1: "Switch", LatestRevisionDate=17-Jul-2002, LatestRevisionNote="Re-released for DXP Platform.", PackageReference=SPST-2, Published=24-Mar-1999, Publisher="Altium Limited"
U1: "Linear Voltage Regulator IC Positive Fixed 1 Output 600mA SOT23-5", Package="SOT-753 Diodes Inc.", Availability="In Stock", Check_prices=https://www.snapeda.com/parts/AP2112K-3.3TRG1/Diodes+Inc./view-part/?ref=eda, MF="Diodes Inc.", MP=AP2112K-3.3TRG1, Price=None, Purchase-URL=https://pricing.snapeda.com/search/part/AP2112K-3.3TRG1/?ref=eda, SnapEDA_Link=https://www.snapeda.com/parts/AP2112K-3.3TRG1/Diodes+Inc./view-part/?ref=snap
U2: library part "FIXED IND 4.7uH 6A 33mΩ SMD,0630", "FIXED IND 4.7uH 6A 33mΩ SMD,0630", LCSC Part #=C5307631, Manufacturer=XR, Link=https://www.lcsc.com/product-detail/C5307631.html?s_z=n_q_t_INDUCTOR%25200630&spm=wm.fly.bg.0.xh___wm.ssy.tc.0.tz&lcsc_vid=FFlaVlZURFlbX1EAE1lbUlZfQwdeBlBRQ1VZBFdQQwUxVlNeRlRfU1ZRQlNZXzsOAxUeFF5JWBYZEEoKFBINSQcJGk4eFQsCAgIaSgADAwAHC0slQ1ZXV1NWWQkaCgg%3D, MPN=XR0630-4R7M, Packaging=SMD,7x6.6mm
U3: "High Efficiency, 3.0A, 18V Input Synchronous Step Down Regulator", LCSC Part #=C479070, Manufacturer=Silergy, Link=https://www.lcsc.com/product-detail/C479070.html?s_z=s_p_SM8103ADC&spm=wm.fly.bg.0.xh&lcsc_vid=FFlaVlZURFlbX1EAE1lbUlZfQwdeBlBRQ1VZBFdQQwUxVlNeRlReUVRTQVFeUDsOAxUeFF5JWBYZEEoKFBINSQcJGk4dAgUUFAk%3D, MPN=SM8103ADC, Packaging=TSOT-23-6
U4: "Others 160MHz QFN-32-EP(5x5) RF Transceiver Modules and Modems RoHS", LCSC Part #=C2838500, Manufacturer=ESPRESSIF, Package=QFN-32-EP(5x5), Link=https://www.lcsc.com/product-detail/C2838500.html?s_z=n_ESP32%2520C3, MPN=ESP32-C3
U5: "433/315 MHz wireless receiver chips", LCSC Part #=C916347, Manufacturer=JSMSEMI, Link=https://www.lcsc.com/product-detail/C916347.html?s_z=n_q_SYN480R&spm=wm.fly.bg.0.xh&lcsc_vid=FlRcBlcDRFNZAlJQT1RZBVJSEVFcX11eRVQPBFEHFgAxVlNeQVVdUFxQR1VXUDsOAxUeFF5JWBYZEEoKFBINSQcJGk4eFQsCAgIaSgADAwAHC0sRHhMLShAJWgMBBhYCWgIBCQoDFBUBFTsLEgYPFBAHBUwUH0kODlNDV0lVBxYaOCdRQ1NXUlNWWQkaCgg%3D, MPN=SYN480R, Packaging=SOP-8
U6: "RZ7889 is a monolithic IC designed for driving bi-directional DC motor"
U7: "8-bit serial-in, serial or parallel-out shift register with output latches; 3-state", LCSC Part #=C5948, Manufacturer=Nexperia, Link=https://www.lcsc.com/product-detail/C5948.html?utm_source=chatgpt.com, MPN=74HC595PW,118, Packaging=TSSOP-16

## Via types
v1: diameter 20, hole 10, Top Layer to Bottom Layer, tented both sides, 404 vias
v2: diameter 62.99, hole 39.37, Top Layer to Bottom Layer, tented both sides, 1 vias

## Nets (pads, with @x,y where several pads share a name; then routed paths per layer and width w, separated by ;. In a path a pad name is that pad's centre, name@x,y a point inside that pad or via, vN(x,y) a via of type N, cw(c..) or ccw(c..) an arc to the next point about the centre after c; other vN are vias at no path point)
+3.3: C3.1 C4.1 C12.1 C13.1 C14.1 C15.1 C25.1 C27.1 D5.2 H1.1 H2.1 H4.1 J1.1 R6.1 R7.2 R8.2 R9.2 R10.2 R12.1 R15.1 R25.1 R26.1 R32.1 R33.1 TP1.1 U1.5 U4.2 U4.3 U4.11 U4.17 U4.31 U4.32 U5.3 U7.10 U7.16 | length 5809.7
  Top Layer w7: R6.1@3465.34,3505 3467.33,3506.99 3467.33,3577.33 H1.1@3485,3595 R10.2@3585.34,3595 R10.2@3585.34,3593.87
  Top Layer w10: C3.1@3557.56,3044.25 3563.81,3038 v1(3601,3038) ; C4.1@3557.56,3114.25 3724.21,3114.25 3796.06,3042.4 R32.1@3800,3042.4 R33.1@3850,3042.4 3980.74,3042.4 R8.2@3982.34,3044 ; C14.1@3557.56,3255 3557.56,3400.06 3588.57,3431.07 3632.16,3431.07 3645.74,3417.5 3672.42,3417.5 U4.11@3672.93,3416.99 ; C15.1@3557.85,3185.33 3679.33,3185.33 3701.57,3207.57 U4.17@3701.57,3289.92 ; v1(3689,3600) 3747.44,3600 C12.1@3750,3597.44 3787.56,3597.44 3800,3585 U4.3@3800,3485 ; U4.32@3868.01,3456.36 3904.65,3456.36 3997.16,3548.87 3999.13,3548.87 4005.9,3555.63 4005.9,3557.6 C13.1@4009.88,3561.59 4009.88,3604.88 4021,3616 4260.5,3616 4277.5,3599 4387,3599 ; v1(3952,3166) 3952.18,3166.18 R9.2@3982.19,3166.18 ; v1(4009,3463) C13.1@4009,3554.5 ; C27.1@4038.98,3241.22 C27.1@4038.98,3239.25 ; U7.16@4135,3038.23 4107.67,3038.23 4074.44,3005 4021.34,3005 3996.35,3029.99 3995.22,3029.99 3982.34,3042.87 R8.2@3982.34,3044 ; U7.10@4135,3191.77 4088.43,3191.77 4051.69,3228.5 4049.72,3228.5 C27.1@4038.98,3239.25 ; J1.1@4428.62,3472.6 4387,3472.6 ; R25.1@4524.66,3730 R25.1@4524.66,3728.87 ; H4.1@4555,3165 4427.88,3292.12 4427.88,3336.76 4387,3377.64 4387,3472.6 ; v1(4829,3696) 4828.28,3696 4809.68,3677.4 D5.2@4771.18,3677.4 ; R12.1@4865.75,3909.97 4856.27,3900.5 4777.48,3900.5 4771.18,3894.2 R26.1@4771.18,3745 D5.2@4771.18,3677.4 ; v1(5011,3532) 5010,3531 C25.1@5010,3500 5010,3406.3 5046.3,3370 U5.3@5070.61,3370 ; R9.2@3982.19,3166.18 3982.19,3044.15 R8.2@3982.34,3044 ; R9.2@3982.19,3166.18 3982.19,3167.31 4012,3197.12 4012,3214.24 4026.26,3228.5 4028.23,3228.5 C27.1@4038.98,3239.25 ; 4387,3472.6 4387,3599 ; 4387,3599 4430,3642 4483.12,3642 4524.66,3683.54 R25.1@4524.66,3728.87 ; R25.1@4524.66,3728.87 4535.54,3717.99 4536.67,3717.99 4567.66,3687 4667,3687 4676.6,3677.4 D5.2@4771.18,3677.4
  Bottom Layer w7: H1.1@3485,3595 3490,3600 v1(3689,3600)
  Bottom Layer w10: H1.1@3485,3595 3470,3580 3470,3197 v1(3601,3066) ; TP1.1@3611,2971 3611,3020 v1(3629,3038) ; v1(3952,3166) 4009,3223 v1(4009,3463) ; v1(4829,3696) 4946,3696 5011,3631 v1(5011,3532)
  other v1: 3629,3066
+5: C2.1 C5.1 C6.1 C7.1 R1.2 R14.1 TP2.1 U1.1 U1.3 U2.2 | length 1483
  Top Layer w10: C2.1@3577.56,2740 3577.56,2681.44 3658,2601 v1(3743,2601) ; v1(4299,3135) 4299,3215.42 4331.75,3248.17 R14.1@4331.75,3336.76
  Bottom Layer w10: TP2.1@3767,2540 3767,2553.61 3743,2577.61 v1(3743,2601) 3743,2806 3759,2822 4008,2822 4150,2964 4200,2964 4299,3063 v1(4299,3135)
BUTTON: C21.2 R12.2 S1.1 TP7.1 U4.4 | length 2285.9
  Top Layer w7: R12.2@4865.75,3850.66 4866.88,3850.66 4909.75,3893.53 4918.5,3893.53 C21.2@4930.75,3905.78 4989.26,3905.78 4996.48,3913 v1(5000,3913) 5039.8,3913 S1.1@5045,3907.8
  Top Layer w10: v1@3775.31,3556.69 3775.31,3553.98 3780.32,3548.98 U4.4@3780.32,3485
  Bottom Layer w7: v1(3775,3557) 3775,3522.95 3742.19,3490.14 3742.19,3322.91 3746.29,3318.81 3832.81,3318.81 3894,3380 3894,3481.37 4049.81,3637.18 4271.18,3637.18 4384,3750 4384,3883 4435,3934 4982,3934 5000,3916 v1(5000,3913) 5000,3875.41 5027,3848.41 TP7.1@5027,3829
CAR_ACC: D6.2 J2.3 OUTPUT1.3 | length 401.3
  Top Layer w7: OUTPUT1.3@4354.9,1904.48 4354.9,1910.38 4405,1960.48 4405,2095.49 4449.98,2140.47 4460.26,2150.75 D6.2@4466.16,2150.75 4466.16,2254.58 J2.3@4465,2255.75
CAR_ECVAN_BREAK: OUTPUT1.11 R20.2 | length 1846
  Top Layer w10: v1(4829.82,3562.28) 4829.82,3593.16 R20.2@4830,3593.35
  Bottom Layer w10: OUTPUT1.11@4654.9,2021.48 4654.9,2040.15 4680,2065.25 4680,2301 4516,2465 4516,2688.92 4669,2841.92 4669,3513 4718,3562 4830,3562 4830,3562.1 v1(4829.82,3562.28)